# EAGLE board ProjetArduino (EAGLE 6.1)
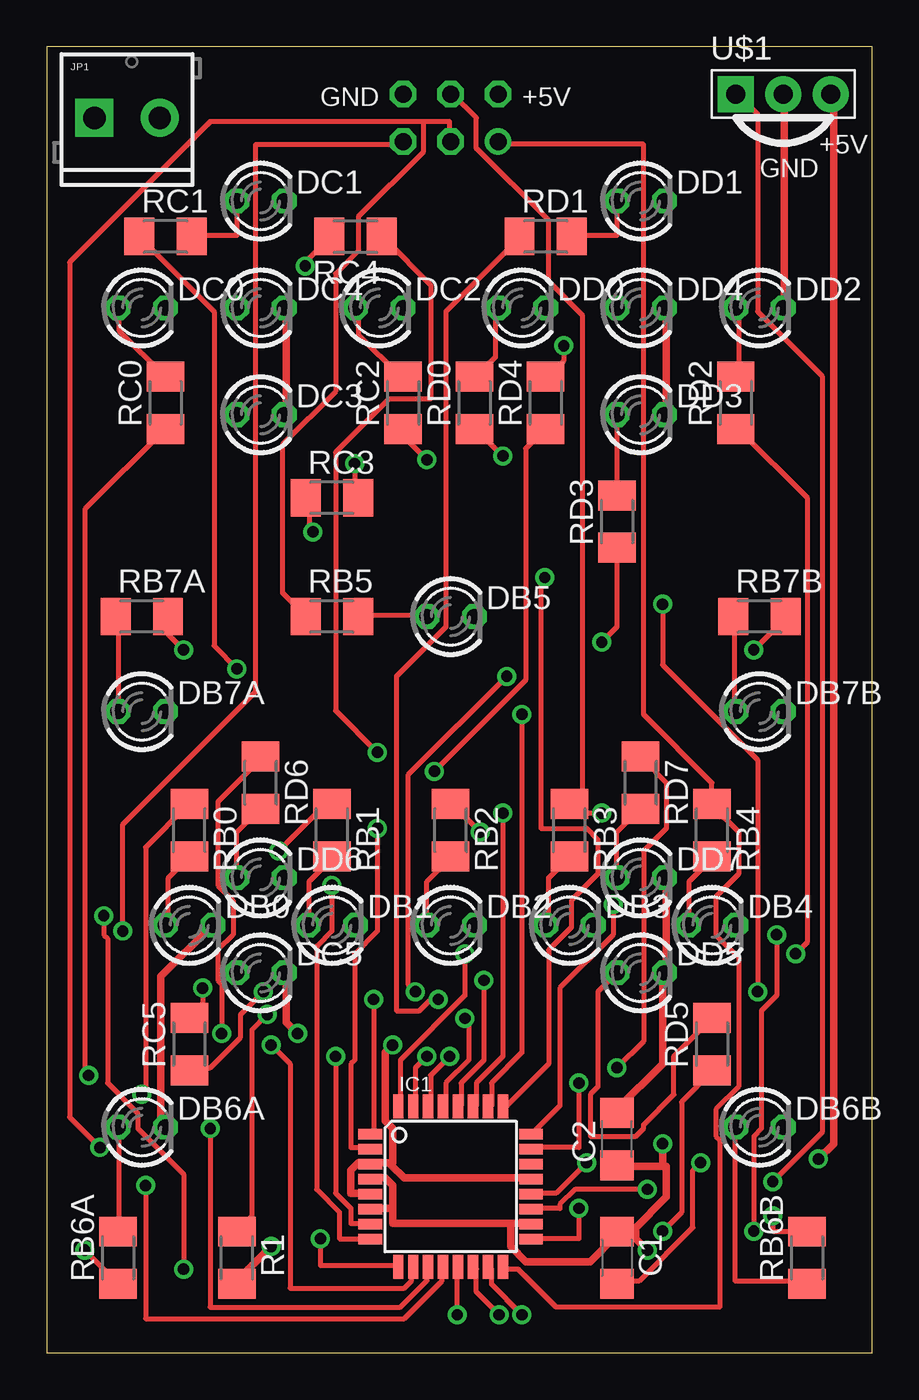
[diagram p0: board, top side]
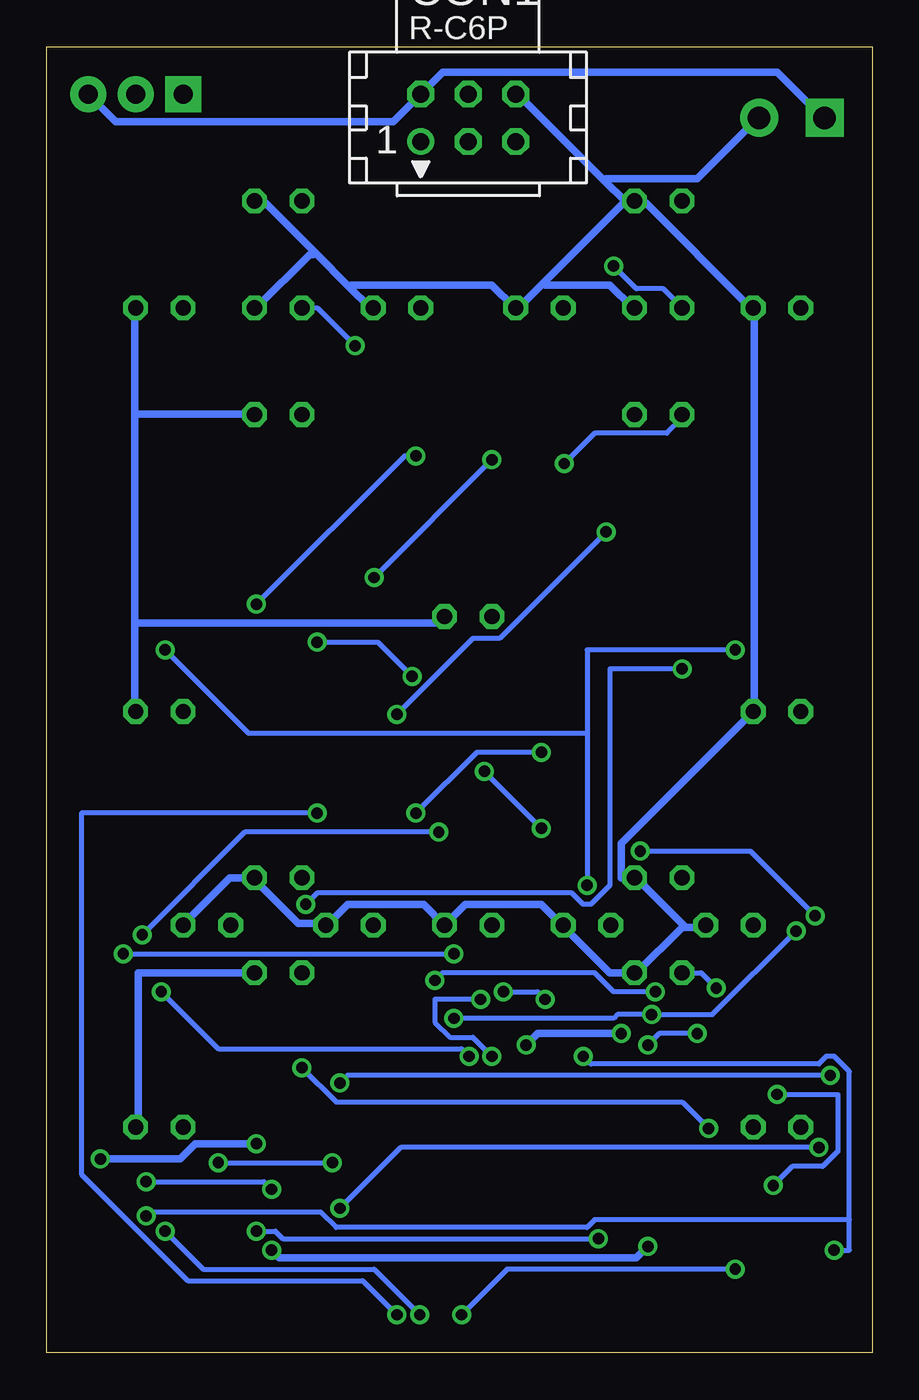
[diagram p1: board, bottom side, seen from below]

Size 44.12 x 69.84 mm. Coordinates in mm from the lower left corner, seen from the top.
Outline: 0,0 44.12,0 44.12,69.84 0,69.84 0,0
Copper layers (1*16): Top 0.035mm / dielectric 1.5mm / Bottom 0.035mm
Design rules: minimum track width 10mil, minimum drill 24mil, track to track 8mil, track to pad 8mil, pad to pad 8mil, via to via 8mil, smd to smd 8mil, copper to edge 40mil, drill to drill 8mil, minimum pad ring 10mil, minimum via ring 8mil, stop-mask expansion 4mil, vias tented up to drill 0mil, thermal gap 10mil
Net classes: 1 power: width 0.406 mm
vRestrict: area 15.2,2.5 to 27.9,15.2

## Footprints (pad centres in the part's own frame; a part is rotated, then mirrored left to right if it is on the bottom)
C1206 = smd 1.6 x 1.8: 1 -1.4,0; 2 1.4,0
TINYISP = drill 0.914 octagon: GND 2.54,1.27; MOSI 0,1.27; RESET 2.54,-1.27; SCK 0,-1.27; VCC -2.54,1.27 | drill 0.914: MISO -2.54,-1.27
LED3MM = drill 0.813 octagon: A -1.27,0; K 1.27,0
TQFP32-08 = smd 1.27 x 0.559: 1 -4.293,2.8; 2 -4.293,2; 3 -4.293,1.2; 4 -4.293,0.4; 5 -4.293,-0.4; 6 -4.293,-1.2; 7 -4.293,-2; 8 -4.293,-2.8; 17 4.293,-2.8; 18 4.293,-2; 19 4.293,-1.2; 20 4.293,-0.4; 21 4.293,0.4; 22 4.293,1.2; 23 4.293,2; 24 4.293,2.8 | smd 0.559 x 1.27: 9 -2.8,-4.293; 10 -2,-4.293; 11 -1.2,-4.293; 12 -0.4,-4.293; 13 0.4,-4.293; 14 1.2,-4.293; 15 2,-4.293; 16 2.8,-4.293; 25 2.8,4.293; 26 2,4.293; 27 1.2,4.293; 28 0.4,4.293; 29 -0.4,4.293; 30 -1.2,4.293; 31 -2,4.293; 32 -2.8,4.293
SCREWTERMINAL-3.5MM-2 = drill 1.2 pad 2.032 square: 1 0,0 | drill 1.2 pad 2.032: 2 3.5,0
M1206 = smd 1.6 x 2: 1 -1.4,0; 2 1.4,0
PNA460XM = drill 1.016 pad 1.93 square: 1 -2.54,0 | drill 1.016 pad 1.93: 2 0,0; 3 2.54,0

## Placement (x,y rotation side)
C1  0.1uF  [C1206]  30.48,5.08 270 top
C2  0.1uF  [C1206]  30.48,11.43 90 top
CON1  [TINYISP]  21.59,66.04 0 bottom
DB0  [LED3MM]  7.62,22.86 0 top
DB1  [LED3MM]  15.24,22.86 0 top
DB2  [LED3MM]  21.59,22.86 0 top
DB3  [LED3MM]  27.94,22.86 0 top
DB4  [LED3MM]  35.56,22.86 0 top
DB5  [LED3MM]  21.59,39.37 0 top
DB6A  [LED3MM]  5.08,12.06 0 top
DB6B  [LED3MM]  38.1,12.06 0 top
DB7A  [LED3MM]  5.08,34.29 0 top
DB7B  [LED3MM]  38.1,34.29 0 top
DC0  [LED3MM]  5.08,55.88 0 top
DC1  [LED3MM]  11.43,61.59 0 top
DC2  [LED3MM]  17.78,55.88 0 top
DC3  [LED3MM]  11.43,50.16 0 top
DC4  [LED3MM]  11.43,55.88 0 top
DC5  [LED3MM]  11.43,20.32 0 top
DD0  [LED3MM]  25.4,55.88 0 top
DD1  [LED3MM]  31.75,61.59 0 top
DD2  [LED3MM]  38.1,55.88 0 top
DD3  [LED3MM]  31.75,50.16 0 top
DD4  [LED3MM]  31.75,55.88 0 top
DD5  [LED3MM]  31.75,20.32 0 top
DD6  [LED3MM]  11.43,25.4 0 top
DD7  [LED3MM]  31.75,25.4 0 top
IC1  MEGA8-AI  [TQFP32-08]  21.59,8.89 0 top
JP1  [SCREWTERMINAL-3.5MM-2]  2.54,66.04 0 top
R1  10k  [M1206]  10.16,5.08 270 top
RB0  1k  [M1206]  7.62,27.94 270 top
RB1  1k  [M1206]  15.24,27.94 270 top
RB2  1k  [M1206]  21.59,27.94 270 top
RB3  1k  [M1206]  27.94,27.94 270 top
RB4  1k  [M1206]  35.56,27.94 270 top
RB5  1k  [M1206]  15.24,39.37 0 top
RB6A  1k  [M1206]  3.81,5.08 90 top
RB6B  1k  [M1206]  40.64,5.08 90 top
RB7A  1k  [M1206]  5.08,39.37 0 top
RB7B  1k  [M1206]  38.1,39.37 0 top
RC0  1k  [M1206]  6.35,50.8 90 top
RC1  1k  [M1206]  6.35,59.69 0 top
RC2  1k  [M1206]  19.05,50.8 90 top
RC3  1k  [M1206]  15.24,45.72 0 top
RC4  1k  [M1206]  16.51,59.69 180 top
RC5  1k  [M1206]  7.62,16.51 90 top
RD0  1k  [M1206]  22.86,50.8 90 top
RD1  1k  [M1206]  26.67,59.69 0 top
RD2  1k  [M1206]  36.83,50.8 90 top
RD3  1k  [M1206]  30.48,44.45 90 top
RD4  1k  [M1206]  26.67,50.8 90 top
RD5  1k  [M1206]  35.56,16.51 90 top
RD6  1k  [M1206]  11.43,30.48 270 top
RD7  1k  [M1206]  31.75,30.48 270 top
U$1  PNA460XM  [PNA460XM]  39.37,67.31 0 top

## Library data of the parts
C1 C2 R1 RB0 RB1-RB5 RB6A RB6B RB7A RB7B RC0 RC1-RC5 RD0 RD1-RD7 = resistor
CON1 = lpatiny; OC_FARNELL: unknown; OC_NEWARK: unknown
DB0 DB1-DB5 DB6A DB6B DB7A DB7B DC0 DC1-DC5 DD0 DD1-DD7 = led
IC1 = atmel; MPN: ATMEGA8-16AU; OC_FARNELL: 9171371; OC_NEWARK: 73M8863
JP1 = SparkFun
U$1 = adafruit

## Nets
+5V [power]: C1.1 C2.1 CON1.VCC IC1.4 IC1.6 IC1.18 JP1.1 R1.2 U$1.3
GND [power]: C2.2 CON1.GND DB0.K DB1.K DB2.K DB3.K DB4.K DB5.K DB6A.K DB6B.K DB7A.K DB7B.K DC0.K DC1.K DC2.K DC3.K DC4.K DC5.K DD0.K DD1.K DD2.K DD3.K DD4.K DD5.K DD6.K DD7.K IC1.3 IC1.5 IC1.21 JP1.2 U$1.2
MISO: CON1.MISO IC1.16 RB4.1
MOSI: CON1.MOSI IC1.15 RB3.1
N$1: IC1.7 RB6A.1 RB6B.2
N$2: IC1.24 RC1.1
N$3: IC1.23 RC0.1
N$4: C1.2 IC1.20
N$5: IC1.26 RC3.1
N$6: IC1.25 RC2.1
N$7: IC1.27 RC4.1
N$8: IC1.28 RC5.1
N$9: IC1.30 RD0.1
N$10: IC1.31 RD1.1
N$11: IC1.1 RD3.1
N$12: IC1.32 RD2.1
N$13: IC1.9 RD5.1
N$14: IC1.2 RD4.1
N$15: IC1.10 RD6.1
N$16: IC1.11 RD7.1
N$17: IC1.12 RB0.1
N$18: IC1.13 RB1.1
N$19: IC1.14 RB2.1
N$21: IC1.8 RB7A.2 RB7B.2
N$23: DB6B.A RB6B.1
N$24: DB7A.A RB7A.1
N$25: DC0.A RC0.2
N$26: DC1.A RC1.2
N$27: DC2.A RC2.2
N$28: DC3.A RC3.2
N$29: DC4.A RC4.2
N$30: DC5.A RC5.2
N$31: DD0.A RD0.2
N$32: DD1.A RD1.2
N$33: DD2.A RD2.2
N$34: DD3.A RD3.2
N$35: DD4.A RD4.2
N$36: DD5.A RD5.2
N$37: DD6.A RD6.2
N$38: DD7.A RD7.2
N$39: DB0.A RB0.2
N$40: DB1.A RB1.2
N$41: DB2.A RB2.2
N$42: DB3.A RB3.2
N$43: DB4.A RB4.2
N$44: DB6A.A RB6A.2
N$45: DB7B.A RB7B.1
N$46: DB5.A RB5.2
N$47: IC1.19 U$1.1
RESET: CON1.RESET IC1.29 R1.1
SCK: CON1.SCK IC1.17 RB5.1

## Tracks (layer width: path | path; a pad name or v marks a point on that pad's centre or on a via)
+5V  (via drill 0.61)
  Top 0.406: 18.49,7.72 17.48,7.72 IC1.6 | 18.49,7.72 18.49,8.94 18.09,9.35 17.48,9.35 IC1.4 | 24.79,6.91 18.49,6.91 18.49,7.72 | 24.79,6.91 25.81,6.91 IC1.18 | 24.79,6.91 24.79,5.69 25.6,4.88 29.06,4.88 30.48,6.3 C1.1 30.48,6.5 31.29,6.5 31.39,6.6 | 32.92,9.96 33.12,9.96 33.12,8.33 31.39,6.6 | 32.92,9.96 30.48,9.96 C2.1 | v11.99,5.69 10.16,3.86 R1.2 | v32.11,5.49 31.5,6.1 31.5,6.5 31.39,6.6 | v32.92,11.18 32.92,9.96 | v41.25,10.36 42.06,11.18 42.06,67.26 U$1.3
  Bottom 0.406: v11.99,5.69 12.6,5.08 31.7,5.08 v32.11,5.49 | U$1.3 40.44,65.84 25.6,65.84 CON1.VCC 22.96,68.48 5.08,68.48 2.64,66.04 JP1.1 | v32.92,11.18 36.17,11.18 36.98,10.36 v41.25,10.36
GND  (via drill 0.61)
  Top 0.406: C2.2 30.48,13.01 32.92,15.44 32.92,20.32 DD5.K 33.12,20.32 33.12,25.4 DD7.K | 26.01,9.35 IC1.21 25.81,9.35 19.1,9.35 18.39,10.06 | 17.48,8.53 IC1.5 17.27,8.53 16.26,8.53 16.26,9.75 16.66,10.16 17.27,10.16 IC1.3 17.48,10.16 18.29,10.16 18.39,10.06 | DB6A.K 6.3,12.19 6.1,12.39 6.1,20.12 8.74,22.76 DB0.K | v18.49,16.46 18.09,16.05 18.09,12.39 18.49,11.99 18.49,10.16 18.39,10.06 | v13.41,17.07 12.8,17.68 12.8,20.32 DC5.K | DC3.K 12.8,50.19 12.8,55.88 DC4.K | DD3.K 33.12,50.19 33.12,55.88 DD4.K | 39.42,67.46 U$1.2 39.42,67.26 39.42,55.88 DD2.K
  Bottom 0.406: DD5.K 39.22,20.32 39.22,12.19 DB6B.K | 33.12,25.4 34.34,25.4 36.78,22.96 DB4.K | 33.12,25.4 30.68,22.96 29.26,22.96 DB3.K 29.06,22.96 28.04,23.98 23.98,23.98 DB2.K 21.74,23.98 17.68,23.98 16.66,22.96 DB1.K 16.46,22.76 14.02,20.32 DC5.K 12.6,20.32 10.16,22.76 9.96,22.76 | 33.12,25.4 DD7.K | 9.96,22.76 8.94,22.76 DB0.K | 9.96,22.76 12.6,25.4 DD6.K 13.41,25.4 13.41,27.23 DB7A.K 6.3,34.34 6.3,55.88 DC0.K 6.5,55.88 12.19,61.57 12.6,61.57 DC1.K | v18.49,16.46 17.88,17.07 v13.41,17.07 | 13.21,61.57 17.58,57.2 | 17.58,57.2 18.9,55.88 DC2.K 19.1,55.88 20.32,57.1 27.84,57.1 27.94,57 | 13.21,61.57 12.8,61.57 DC1.K | 13.21,61.57 14.33,62.69 | 14.33,62.69 18.9,67.26 CON1.GND | 13.21,61.57 DC1.K | JP1.2 6.1,66.04 9.35,62.79 14.22,62.79 14.33,62.69 | DC4.K 12.8,55.88 14.02,57.1 17.48,57.1 17.58,57.2 | 29.77,58.83 32.51,61.57 32.92,61.57 DD1.K | 29.77,58.83 27.94,57 | 27.94,57 26.82,55.88 DD0.K | DD4.K 32.92,55.88 30.07,58.73 29.87,58.73 29.77,58.83 | 39.42,50.19 39.42,55.88 DD2.K | 39.42,50.19 39.42,39.01 | 39.42,39.01 39.42,34.34 DB7B.K | 39.42,39.01 23.16,39.01 22.96,39.22 DB5.K | 39.42,50.19 33.12,50.19 DD3.K
MISO
  Top 0.254: IC1.16 24.59,4.47 25.2,4.47 27.23,2.44 35.97,2.44 35.97,11.38 35.76,11.58 35.76,13.01 36.98,14.22 36.98,21.13 35.76,22.35 35.76,24.38 36.98,25.6 36.98,27.84 35.56,29.26 RB4.1 35.56,30.48 31.9,34.14 31.9,64.62 24.18,64.62 CON1.MISO
MOSI  (via drill 0.61)
  Top 0.254: v25.4,2.03 23.77,3.66 23.77,4.47 IC1.15 | 28.65,28.85 28.04,28.85 28.04,29.26 RB3.1 28.65,28.85 | 28.65,28.85 v29.67,28.85 | 28.65,28.85 28.65,55.47 26.82,57.3 26.82,60.55 22.96,64.41 22.96,66.04 21.74,67.26 CON1.MOSI
  Bottom 0.254: v25.4,2.03 27.23,3.86 36.58,3.86 42.27,9.55 42.27,28.85 v29.67,28.85
N$1  (via drill 0.61)
  Top 0.254: v15.44,15.85 15.44,8.53 16.26,7.72 16.26,6.91 17.27,6.91 IC1.7 | v2.03,5.49 3.66,3.86 RB6A.1 | v38.81,7.32 38.81,6.5 40.64,6.5 RB6B.2
  Bottom 0.254: v15.44,15.85 15.04,15.44 2.85,15.44 2.44,15.85 2.03,15.85 1.22,15.04 1.22,7.11 | 1.22,7.11 1.22,5.49 v2.03,5.49 | v38.81,7.32 38.61,7.52 29.46,7.52 28.65,6.71 15.24,6.71 14.83,7.11 1.22,7.11
N$2  (via drill 0.61)
  Top 0.254: v30.28,23.98 30.28,22.35 27.43,19.51 27.43,13.21 26.01,11.79 IC1.24 | v10.16,36.58 8.94,37.8 8.94,55.68 5.08,59.54 RC1.1
  Bottom 0.254: v30.28,23.98 29.67,24.59 16.05,24.59 15.44,23.98 15.04,23.98 14.02,24.99 14.02,36.58 v10.16,36.58
N$3  (via drill 0.61)
  Top 0.254: v28.45,14.43 28.45,10.97 26.01,10.97 IC1.23 | v2.23,14.83 2.03,15.04 2.03,45.11 6.3,49.38 RC0.1
  Bottom 0.254: v28.45,14.43 28.04,14.83 v2.23,14.83
N$4  (via drill 0.61)
  Top 0.254: v28.85,10.16 27.23,8.53 26.01,8.53 IC1.20 | v34.95,10.16 34.54,9.75 34.54,6.71 31.7,3.86 30.48,3.86 C1.2
  Bottom 0.254: v34.95,10.16 v28.85,10.16
N$5  (via drill 0.61)
  Top 0.254: v25.4,34.14 25.4,16.05 23.77,14.43 23.77,13.21 IC1.26 | v14.22,43.89 14.02,44.09 14.02,45.72 RC3.1
  Bottom 0.254: v25.4,34.14 21.34,38.2 19.91,38.2 v14.22,43.89
N$6  (via drill 0.61)
  Top 0.254: v26.62,41.45 26.42,41.25 26.42,28.04 28.85,28.04 29.46,27.43 29.46,25.6 28.04,24.18 28.04,22.76 26.82,21.54 26.82,15.44 24.59,13.21 IC1.25 | v20.32,47.75 19.1,48.97 19.1,49.38 RC2.1
  Bottom 0.254: v20.32,47.75 v26.62,41.45
N$7  (via drill 0.61)
  Top 0.254: v24.38,28.85 24.38,15.85 22.96,14.43 22.96,13.21 IC1.27 | v17.68,32.11 15.44,34.34 15.44,48.16 18.29,51 20.52,51 20.52,57.1 18.09,59.54 RC4.1
  Bottom 0.254: v24.38,28.85 21.13,32.11 v17.68,32.11
N$8  (via drill 0.61)
  Top 0.254: v23.37,19.91 23.37,15.65 22.15,14.43 22.15,13.21 IC1.28 | v11.58,19.3 10.36,18.09 10.36,16.87 8.74,15.24 7.72,15.24 RC5.1
  Bottom 0.254: v23.37,19.91 22.96,20.32 14.83,20.32 13.82,19.3 v11.58,19.3
N$9  (via drill 0.61)
  Top 0.254: v21.54,15.85 20.52,14.83 20.52,13.21 IC1.30 | v38,19.3 38,31.7 32.92,36.78 v32.92,40.03 | v24.38,47.95 22.96,49.38 RD0.1
  Bottom 0.254: v21.54,15.85 21.95,16.26 34.95,16.26 v38,19.3 | v32.92,40.03 24.99,47.95 v24.38,47.95
N$10  (via drill 0.61)
  Top 0.254: v20.32,15.85 19.71,15.24 19.71,13.21 IC1.31 | v20.93,18.9 20.52,18.9 19.91,18.29 18.69,18.29 18.69,36.17 21.34,38.81 21.34,55.68 25.2,59.54 RD1.1
  Bottom 0.254: v20.32,15.85 21.34,16.87 22.55,16.87 23.37,17.68 23.37,18.9 v20.93,18.9
N$11  (via drill 0.61)
  Top 0.254: v17.48,18.9 17.48,11.79 IC1.1 | v19.71,19.3 19.3,19.71 19.3,30.89 v24.59,36.17 | v29.67,38 30.48,38.81 RD3.1
  Bottom 0.254: v17.48,18.9 17.88,19.3 v19.71,19.3 | v24.59,36.17 26.42,38 v29.67,38
N$12  (via drill 0.61)
  Top 0.254: v22.35,21.34 22.35,19.1 18.9,15.65 18.9,13.21 IC1.32 | v40.03,21.34 40.64,21.95 40.64,45.72 36.98,49.38 RD2.1
  Bottom 0.254: v40.03,21.34 v22.35,21.34
N$13  (via drill 0.61)
  Top 0.254: v14.63,6.1 14.63,4.67 18.69,4.67 IC1.9 | v32.92,6.5 33.93,7.52 33.93,13.41 35.56,15.04 RD5.1
  Bottom 0.254: v14.63,6.1 31.5,6.1 31.9,6.5 v32.92,6.5
N$14  (via drill 0.61)
  Top 0.254: v17.68,28.04 17.68,22.55 16.46,21.34 16.46,15.65 16.26,15.44 16.26,10.97 17.27,10.97 IC1.2 | v20.73,31.09 25.6,35.97 25.6,48.36 26.62,49.38 RD4.1
  Bottom 0.254: v20.73,31.09 v17.68,28.04
N$15  (via drill 0.61)
  Top 0.254: v11.99,16.46 13.01,15.44 13.01,3.45 19.1,3.45 19.51,3.86 19.51,4.47 IC1.10 | v9.35,17.07 9.35,19.71 9.14,19.91 9.14,21.54 9.96,22.35 9.96,24.18 9.14,24.99 9.14,29.46 11.38,31.7 RD6.1
  Bottom 0.254: v11.99,16.46 11.38,17.07 v9.35,17.07
N$16  (via drill 0.61)
  Top 0.254: v8.74,11.99 8.74,2.44 18.9,2.44 20.32,3.86 20.32,4.47 IC1.11 | v30.48,15.24 31.9,16.66 31.9,26.82 33.12,28.04 33.12,30.48 31.9,31.7 RD7.1
  Bottom 0.254: v8.74,11.99 10.16,13.41 28.65,13.41 v30.48,15.24
N$17  (via drill 0.61)
  Top 0.254: v5.28,8.94 5.28,1.83 19.1,1.83 21.13,3.86 21.13,4.47 IC1.12 | v5.08,13.82 5.28,14.02 5.28,27.03 7.52,29.26 RB0.1
  Bottom 0.254: v5.28,8.94 4.27,9.96 2.64,9.96 1.83,10.77 1.83,13.82 v5.08,13.82
N$18  (via drill 0.61)
  Top 0.254: v21.95,2.03 21.95,4.47 IC1.13 | v7.32,4.47 7.32,9.55 4.88,11.99 4.88,12.8 3.25,14.43 3.25,22.15 3.05,22.35 v3.05,23.37 | v12.39,26.82 14.83,29.26 15.24,29.26 RB1.1
  Bottom 0.254: v21.95,2.03 19.51,4.47 v7.32,4.47 | v3.05,23.37 6.5,26.82 v12.39,26.82
N$19  (via drill 0.61)
  Top 0.254: v24.18,2.03 22.96,3.25 22.96,4.47 IC1.14 | v37.8,6.5 37.8,11.58 38.2,11.99 38.2,18.29 39.01,19.1 v39.01,22.35 | v23.16,27.84 21.74,29.26 RB2.1
  Bottom 0.254: v24.18,2.03 26.62,4.47 35.76,4.47 v37.8,6.5 | v39.01,22.35 33.53,27.84 v23.16,27.84
N$21  (via drill 0.61)
  Top 0.254: v15.24,24.99 15.24,22.55 14.43,21.74 14.43,8.74 15.65,7.52 15.65,6.1 17.27,6.1 IC1.8 | v7.32,37.59 6.5,38.41 6.5,39.22 RB7A.2 | v37.8,37.59 39.42,39.22 RB7B.2
  Bottom 0.254: 15.24,33.12 15.24,37.59 v7.32,37.59 | 15.24,33.12 v15.24,24.99 | v37.8,37.59 33.33,33.12 15.24,33.12
N$23
  Top 0.254: RB6B.1 40.64,3.86 36.78,3.86 36.78,11.99 DB6B.A
N$24
  Top 0.254: RB7A.1 3.86,39.22 3.86,34.34 DB7A.A
N$25
  Top 0.254: RC0.2 6.3,52.22 3.86,54.66 3.86,55.88 DC0.A
N$26
  Top 0.254: DC1.A 10.16,59.74 7.92,59.74 RC1.2
N$27
  Top 0.254: RC2.2 18.9,52.22 16.66,54.46 16.66,55.88 DC2.A
N$28  (via drill 0.61)
  Top 0.254: v16.46,47.55 16.46,45.72 RC3.2
  Bottom 0.254: v16.46,47.55 14.83,49.17 10.97,49.17 10.16,49.99 DC3.A
N$29  (via drill 0.61)
  Top 0.254: v13.82,58.12 13.82,58.32 15.04,59.54 RC4.2
  Bottom 0.254: v13.82,58.12 12.6,56.9 11.18,56.9 DC4.A
N$30  (via drill 0.61)
  Top 0.254: v8.33,19.51 8.33,18.69 7.72,18.09 RC5.2
  Bottom 0.254: v8.33,19.51 9.14,20.32 DC5.A
N$31
  Top 0.254: RD0.2 22.96,52.22 23.98,53.24 23.98,55.88 DD0.A
N$32
  Top 0.254: DD1.A 30.48,59.74 28.25,59.74 RD1.2
N$33
  Top 0.254: RD2.2 36.98,52.22 36.98,55.88 DD2.A
N$34
  Top 0.254: DD3.A RD3.2
N$35  (via drill 0.61)
  Top 0.254: v27.64,53.85 27.64,53.03 26.82,52.22 RD4.2
  Bottom 0.254: v27.64,53.85 29.67,55.88 DD4.A
N$36
  Top 0.254: DD5.A 29.46,19.3 29.46,14.22 29.06,13.82 29.06,11.58 31.5,11.58 31.9,11.99 31.9,12.19 33.53,13.82 33.53,15.85 35.56,17.88 RD5.2
N$37
  Top 0.254: DD6.A 10.16,27.84 11.38,29.06 RD6.2
N$38
  Top 0.254: DD7.A 30.48,27.84 31.7,29.06 RD7.2
N$39
  Top 0.254: RB0.2 7.52,26.42 6.5,25.4 6.5,22.96 DB0.A
N$40
  Top 0.254: RB1.2 15.24,26.42 14.02,25.2 14.02,22.96 DB1.A
N$41
  Top 0.254: DB2.A 20.32,25.2 21.54,26.42 RB2.2
N$42
  Top 0.254: RB3.2 27.84,26.42 26.82,25.4 26.82,22.96 DB3.A
N$43
  Top 0.254: RB4.2 35.56,26.42 34.34,25.2 34.34,22.96 DB4.A
N$44
  Top 0.254: RB6A.2 3.86,6.5 3.86,11.99 DB6A.A
N$45
  Top 0.254: RB7B.1 36.78,39.22 36.78,34.34 DB7B.A
N$46
  Top 0.254: RB5.2 16.66,39.42 20.32,39.42 DB5.A
N$47  (via drill 0.61)
  Top 0.254: v32.11,8.74 28.25,8.74 27.43,7.92 27.43,7.72 26.01,7.72 IC1.19 | v38.81,9.14 41.45,11.79 41.45,52.22 38,55.68 38,66.24 36.98,67.26 U$1.1
  Bottom 0.254: v32.11,8.74 32.51,9.14 v38.81,9.14
RESET  (via drill 0.61)
  Top 0.254: v22.35,17.88 22.55,17.68 22.55,15.65 21.34,14.43 21.34,13.21 IC1.29 | v11.79,18.09 10.97,17.27 10.97,7.32 10.16,6.5 R1.1 | v4.06,22.55 4.06,28.25 11.18,35.36 11.18,64.62 18.9,64.62 CON1.RESET
  Bottom 0.254: v22.35,17.88 13.82,17.88 13.61,18.09 v11.79,18.09 8.53,18.09 v4.06,22.55
SCK  (via drill 0.61)
  Top 0.254: v28.45,7.72 28.45,6.1 26.01,6.1 IC1.17 | v2.85,10.97 1.22,12.6 1.22,58.32 8.74,65.84 20.12,65.84 | 20.12,65.84 21.54,65.84 21.54,64.82 CON1.SCK | 20.12,65.84 20.12,64.21 16.66,60.76 16.66,58.93 15.44,57.71 15.44,51.41 12.6,48.56 12.6,40.64 13.82,39.42 RB5.1
  Bottom 0.254: v28.45,7.72 25.2,10.97 v2.85,10.97

## Text on the board
tNames: GND | +5V | +5V | GND
tValues: +5V | GND